# Altium PCB KC_BaseBoard.PcbDoc
Units mil, origin at the board's own origin, x right, y up, seen from the top; angles counter-clockwise.
Board outline 9490 x 7010 mil, 2 copper layers (Top Layer, Bottom Layer); 73 components, 43 nets, 167 pads, 0 vias.
Unrouted connection lines stored in the file: 122.
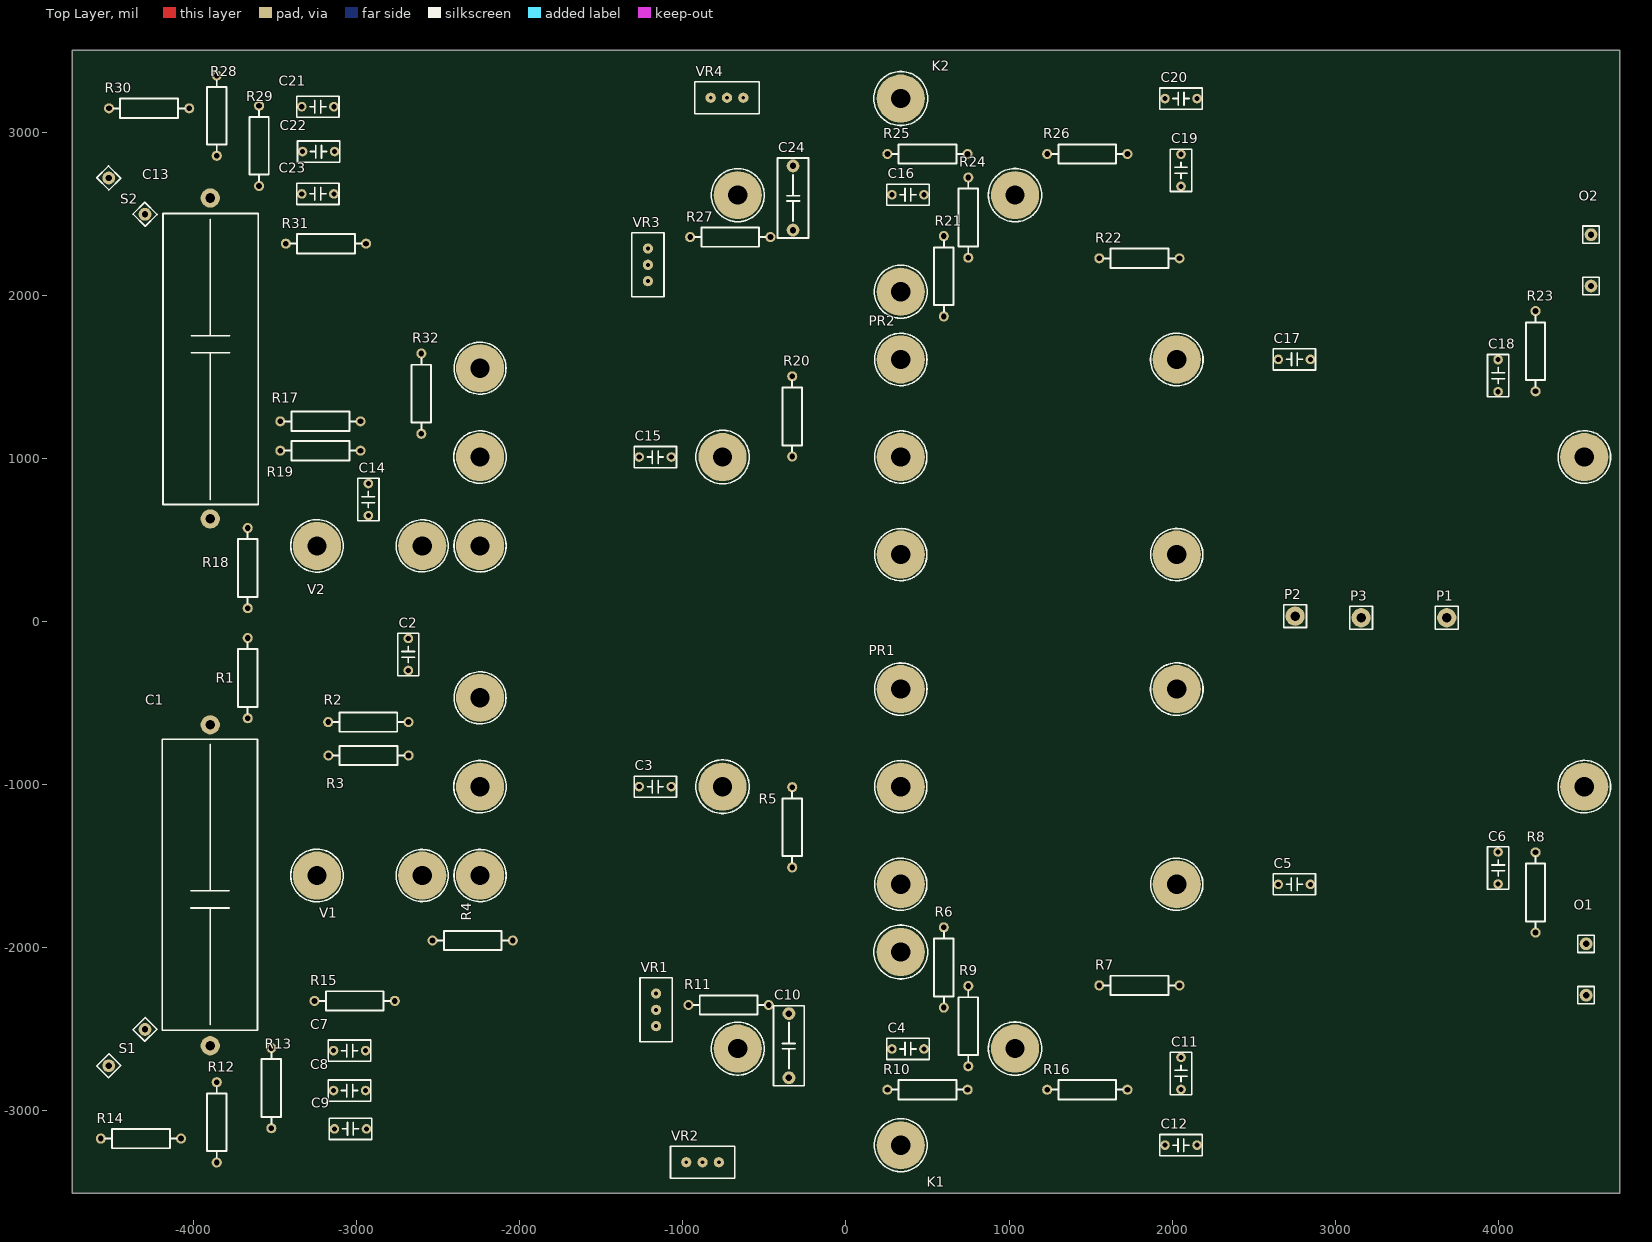
[diagram p0: Top Layer view]
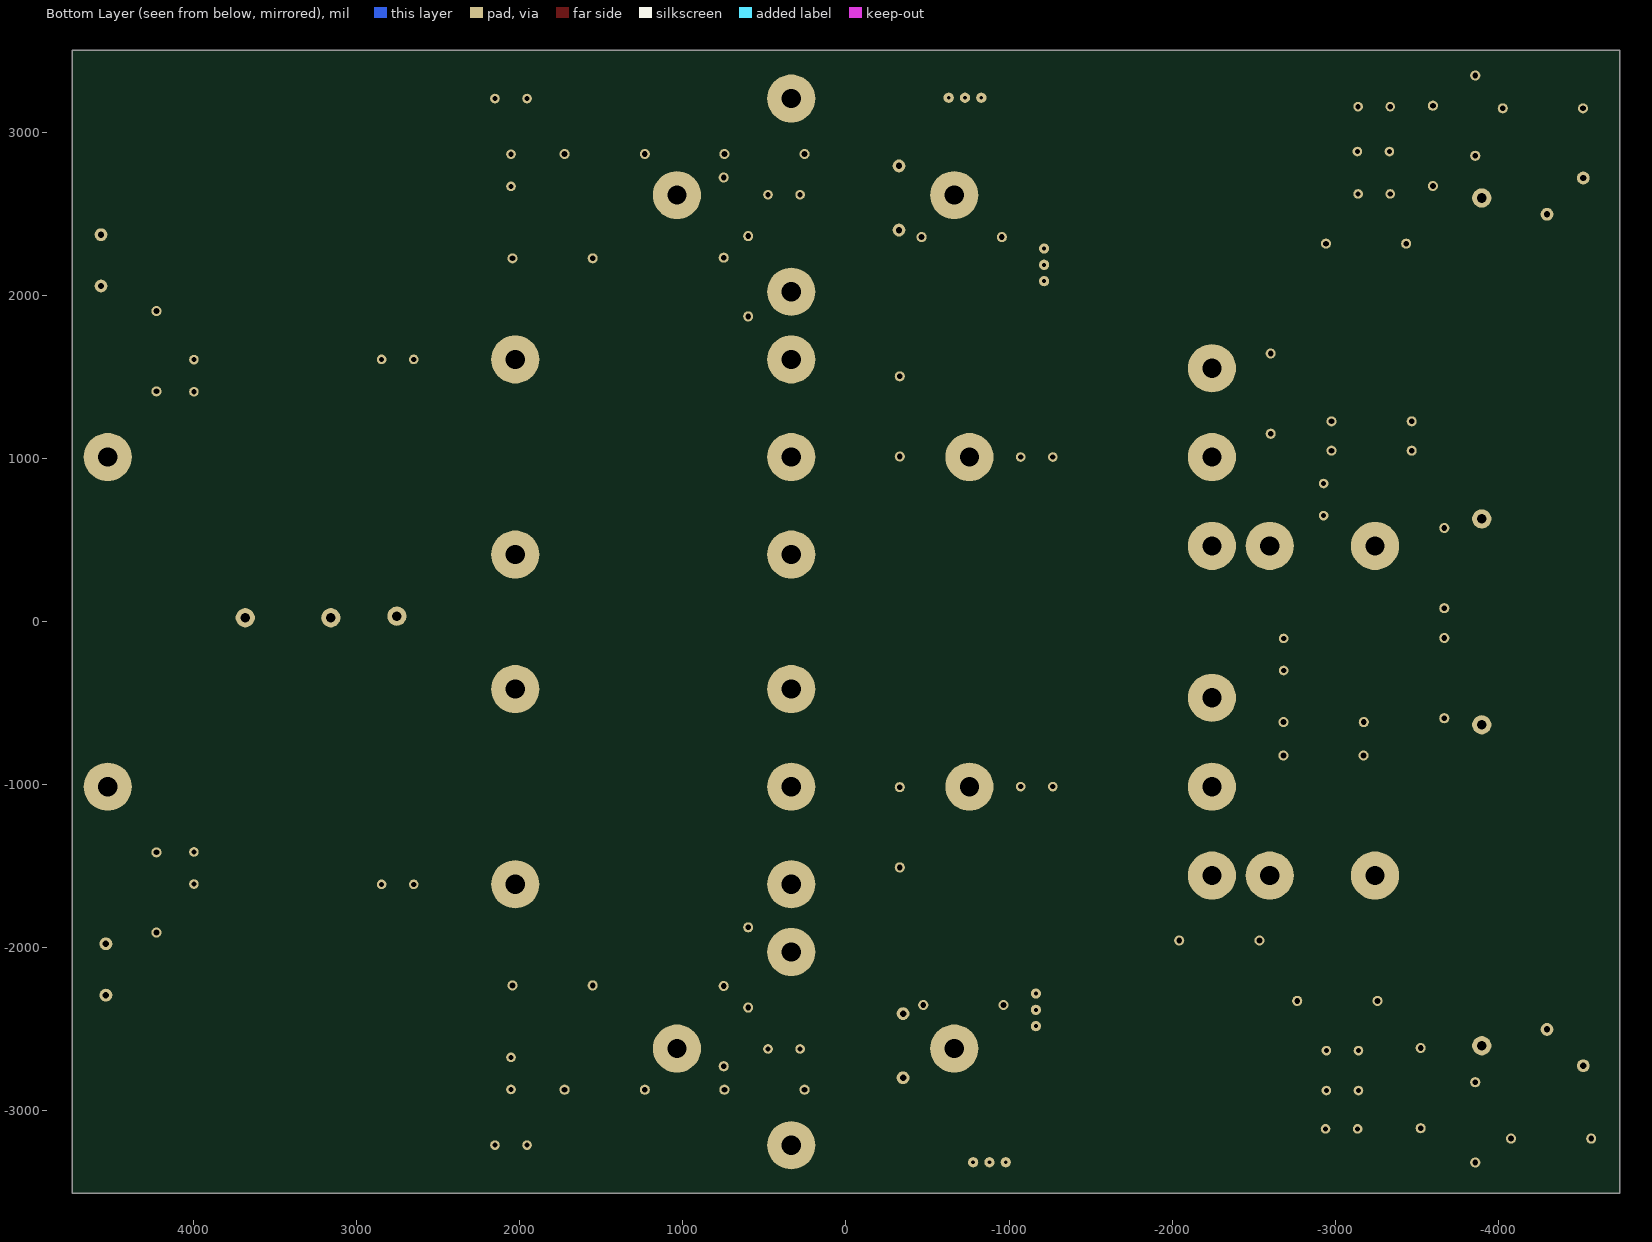
[diagram p1: Bottom Layer view, seen from below]

## Layer stack, top to bottom
Top Solder: solder mask 0.4, Solder Resist, Dk 3.5
Top Layer: signal copper 1.4
Dielectric 1: dielectric 12.6, FR-4, Dk 4.8
Bottom Layer: signal copper 1.4
Bottom Solder: solder mask 0.4, Solder Resist, Dk 3.5

## Board outline
-4745,-3505 -4745,3505 4745,3505 4745,-3505

## Design rules (kind name [scope] priority, off if disabled: settings)
Clearance [All] p1: gap=10 ignorepadtopadclearanceinfootprint=FALSE except(0: Arc-Hole Track-Hole SMDPad-Hole THPad-Hole Via-Hole Fill-Hole Poly-Hole Region-Hole Text-Hole)
PolygonConnect [All] p1: connectstyle=Relief reliefconductorwidth=10 reliefentries=4 polygonreliefangle="90 Angle" airgapwidth=10
RoomDefinition KC_BaseBoardSch [InComponentClass('KC_BaseBoardSch')] p1: confinementstyle=ConfineIn formatcopy=TRUE lockcomponents=FALSE outline 6180,-3443.15 22665,-3443.15 22665,2856.85 6180,2856.85
RoutingVias [All] p1: holewidth=28 width=50 viastyle="Through Hole" minholewidth=28 minwidth=50 maxholewidth=28 maxwidth=50
SolderMaskExpansion [All] p1: expansion=4
Width [All] p1: maxlimit=10 minlimit=10 preferedwidth=10
30 further rules are at their usual default settings.

## Components (designator, comment, footprint, x,y, rotation, side; value= is the part's Value field where it differs from the comment)
C1 "0.1uF/275V" "CBB 50*30*30" -3900,-2600 r90 top
C2 "0.1uF/275V" "CBB 6.3*6.3*5" -2685,-200 r270 top
C3 "0.1uF/275V" "CBB 6.3*6.3*5" -1170,-1011 r0 top
C4 "0.1uF/275V" "CBB 6.3*6.3*5" 380,-2620 r0 top
C5 "0.1uF/275V" "CBB 6.3*6.3*5" 2750,-1610 r0 top
C6 "0.1uF/275V" "CBB 6.3*6.3*5" 4000,-1510 r270 top
C7 "0.1uF/275V" "CBB 6.3*6.3*5" -3045,-2630 r180 top
C8 "0.1uF/275V" "CBB 6.3*6.3*5" -3045,-2875 r180 top
C9 "0.1uF/275V" "CBB 6.3*6.3*5" -3040,-3110 r180 top
C10 "0.1uF/275V" "CBB 10*12*8" -350,-2600 r90 top
C11 "0.1uF/275V" "CBB 6.3*6.3*5" 2055,-2770 r270 top
C12 "0.1uF/275V" "CBB 6.3*6.3*5" 2055,-3210 r0 top
C13 "0.1uF/275V" "CBB 50*30*30" -3900,2600 r270 top
C14 "0.1uF/275V" "CBB 6.3*6.3*5" -2930,750 r90 top
C15 "0.1uF/275V" "CBB 6.3*6.3*5" -1170,1011 r0 top
C16 "0.1uF/275V" "CBB 6.3*6.3*5" 380,2620 r0 top
C17 "0.1uF/275V" "CBB 6.3*6.3*5" 2750,1610 r180 top
C18 "0.1uF/275V" "CBB 6.3*6.3*5" 4000,1510 r90 top
C19 "0.1uF/275V" "CBB 6.3*6.3*5" 2055,2770 r270 top
C20 "0.1uF/275V" "CBB 6.3*6.3*5" 2055,3210 r180 top
C21 "0.1uF/275V" "CBB 6.3*6.3*5" -3240,3160 r0 top
C22 "0.1uF/275V" "CBB 6.3*6.3*5" -3235,2885 r0 top
C23 "0.1uF/275V" "CBB 6.3*6.3*5" -3240,2625 r0 top
C24 "0.1uF/275V" "CBB 10*12*8" -325,2600 r90 top
K1 "KCBuff" KCBUFF -663.9,-2617.7 r0 top
K2 "KCBuff" KCBUFF -663.9,2617.7 r0 top
O1 "Signal_Out" SIGNAL_TERMINAL 4540,-2289.96 r90 top
O2 "Signal_Out" SIGNAL_TERMINAL 4570,2060 r90 top
P1 "Power V+" SinglePin 3685,25 r0 top
P2 "Power V-" SinglePin 2755,35 r0 top
P3 "Power GND" SinglePin 3160,25 r0 top
PR1 "MainBoardPowerRegulator" KC_MBPOWERREG 336,-1011 r0 top
PR2 "MainBoardPowerRegulator" KC_MBPOWERREG 336,1011 r0 top
R1 "270K" "RS 1/2W" -3670,-345 r270 top
R2 "402R" "RS 1/2W" -2930,-615 r0 top
R3 "10R" "RS 1/2W" -2928.94,-820 r0 top
R4 "10R" "RS 1/2W" -2290,-1955 r180 top
R5 "45.3R" "RS 1/2W" -330,-1260 r90 top
R6 "15K" "RS 1/2W" 600,-2120 r270 top
R7 "200R" "RS 1/2W" 1800,-2230 r0 top
R8 "100K" "RS 1/2W" 4230,-1660 r270 top
R9 "24.9K" "RS 1/2W" 750,-2480 r270 top
R10 "24.9K" "RS 1/2W" 500,-2870 r180 top
R11 "100K" "RS 1/2W" -720,-2350 r180 top
R12 "1K" "RS 1/2W" -3860,-3070 r270 top
R13 "200R" "RS 1/2W" -3525,-2860 r90 top
R14 "21R" "RS 1/2W" -4325,-3170 r180 top
R15 "75R" "RS 1/2W" -3013.94,-2325 r180 top
R16 "604R" "RS 1/2W" 1480,-2870 r180 top
R17 "402R" "RS 1/2W" -3223.94,1230 r0 top
R18 "270K" "RS 1/2W" -3670,330 r90 top
R19 "10R" "RS 1/2W" -3223.94,1050 r180 top
R20 "45.3R" "RS 1/2W" -330,1260 r90 top
R21 "15K" "RS 1/2W" 600,2120 r270 top
R22 "200R" "RS 1/2W" 1800,2230 r180 top
R23 "100K" "RS 1/2W" 4230,1660 r90 top
R24 "24.9K" "RS 1/2W" 750,2480 r270 top
R25 "24.9K" "RS 1/2W" 500,2870 r0 top
R26 "604R" "RS 1/2W" 1480,2870 r180 top
R27 "100K" "RS 1/2W" -710,2360 r180 top
R28 "1K" "RS 1/2W" -3860,3105 r90 top
R29 "200R" "RS 1/2W" -3600,2920 r90 top
R30 "21R" "RS 1/2W" -4275,3150 r0 top
R31 "75R" "RS 1/2W" -3190,2320 r180 top
R32 "10R" "RS 1/2W" -2605,1400 r270 top
S1 "Signal_In" SIGNAL_TERMINAL -4300,-2500 r225 top
S2 "Signal_In" SIGNAL_TERMINAL -4300,2500 r135 top
V1 "KCInputVas" KCIN_VAS -3245,-1556 r0 top
V2 "KCInputVas" KCIN_VAS -3245,466 r0 top
VR1 "100K" "RS 1/2W-VR" -1165,-2380 r270 top
VR2 "5K" "RS 1/2W-VR" -880,-3315 r0 top
VR3 "100K" "RS 1/2W-VR" -1215,2190 r270 top
VR4 "5K" "RS 1/2W-VR" -730,3215 r180 top

## Footprints (in the part's own frame and the unit in brackets; to place one, negate y for a bottom-side part, rotate by r counter-clockwise, add the part's x,y. Pads: shape width x height; smd on the part's side, far side on the other; paste and mask are expansions set on the pad)
"CBB 6.3*6.3*5" [mm] "脚距5mm高6.3mm厚3mm"
  round 1.5 hole 0.8: 1(-2.5,0) 2(2.5,0)
  silkscreen extent -3.3,-1.65 3.3,1.65, body extent -3.15,-1.5 3.15,1.5, height 6.8
"CBB 10*12*8" [mm] "脚距10mm高12mm厚8mm"
  round 2 hole 1: 1(-5,0) 2(5,0)
  silkscreen extent -6.22,-2.41 6.22,2.41, body extent -6,-2.25 6,2.25, height 8.53
"CBB 50*30*30" [mm] "大型耦合电容 脚距50mm 宽30mm"
  round 3 hole 1.5: 1(0,0) 2(50,0)
  silkscreen extent 2.41,-7.37 47.75,7.49, body extent 2.41,-7.49 47.75,7.62, height 30.3
KC_MBPOWERREG [mm]
  round 7.5 hole 3: 1(0,15.2) 2(0,-15.2) 3(43,15.2) 4(43,-15.2) 5(0,0) 6(106.5,0)
  silkscreen extent -4.07,-19.27 110.59,19.29
KCBUFF [mm]
  round 7.5 hole 3: 1(0,0) 2(43.199,0) 3(25.397,15.05) 4(25.397,-15.05)
  silkscreen extent -4.13,-19.18 47.35,19.25
KCIN_VAS [mm]
  round 7.5 hole 3: 1(0,0) 2(16.396,0) 3(25.4,27.686) 4(25.4,0) 5(25.4,13.843) 6(63.182,13.843)
  silkscreen extent -4.09,-4.09 67.36,31.73
"RS 1/2W" [mil] "直插色环电阻，脚距12.5mm，直径3mm"
  round 62 hole 35.43: 1(-246.06,0) 2(246.06,0)
  silkscreen extent -217,-59 217,59, body extent -256,-59 256,59, height 122
"RS 1/2W-VR" [mm] "直插3脚顶调可调电阻，脚距2.54mm，长10mm*宽5mm*高10mm"
  round 1.6 hole 0.6: 1(-2.54,0) 2(2.54,0) 3(0,0)
  silkscreen extent -5,-2.5 5,2.5
SIGNAL_TERMINAL [mm]
  round 2 hole 1: 1(0,0) 2(8,0)
  silkscreen extent -1.35,-1.3 9.35,1.3
SinglePin [mm] "Single Pin For Power Wire or GND"
  round 3 hole 1.5: 1(0,0)
  silkscreen extent -1.78,-1.78 1.78,1.78

## Part data
C1 C2 C3 C4 C5 C6 C7 C8 C9 C10 C11 C12 C13 C14 C15 C16 C17 C18 C19 C20 C21 C22 C23 C24: library part C-CBB, "CBB电容", BOM名称=CBB电容, 学习资源=www.ooocke.com, 版权归属=源创客
K1 K2: "King Cello Buffer Stage"
O1 O2: "Signal Out"
P1 P2: library part PowerPin, "Power Pin"
P3: library part PowerPin
PR1 PR2: "King Cello Main Board Power Regulator"
R1 R2 R3 R4 R5 R6 R7 R8 R9 R10 R11 R12 R13 R14 R15 R16 R17 R18 R19 R20 R21 R22 R23 R24 R25 R26 R27 R28 R29 R30 R31 R32: library part R-CRR, "直插色环电阻", BOM名称=色环电阻, 学习资源=www.ooocke.com, 版权归属=源创客
S1 S2: "Signal In"
V1 V2: "King Cello Input Stage and VAS"
VR1 VR2 VR3 VR4: library part VR-W, "直插可调电阻-顶调"

## Nets (pads, with @x,y where several pads share a name; then routed paths per layer and width w, separated by ;. In a path a pad name is that pad's centre, name@x,y a point inside that pad or via, vN(x,y) a via of type N, cw(c..) or ccw(c..) an arc to the next point about the centre after c; other vN are vias at no path point)
GND: C2.1 C6.1 C11.1 C12.1 C14.1 C18.2 C19.2 C20.2 O1.2 O2.2 P3.1 PR1.5 PR2.5 R1.1 R6.1 R8.1 R14.1 R15.1 R18.1 R21.2 R23.2 R30.1 R31.1 S1.2 S2.2 V1.5 V2.5
NetC1_1: C1.1 S1.1
NetC1_2: C1.2 R1.2 R2.1
NetC2_2: C2.2 R2.2 R3.2
NetC3_1: C3.1 C7.2 C8.2 C9.2 R4.1 R10.2
NetC3_2: C3.2 R5.2 V1.6
NetC4_1: C4.1 K1.1 R5.1
NetC4_2: C4.2 R6.2
NetC5_1: C5.1 C5.2 C6.2 O1.1 R7.2 R8.2
NetC7_1: C7.1 C8.1 C9.1 R13.2 R14.2 R15.2
NetC10_1: C10.1 VR2.1 VR2.3
NetC10_2: C10.2 K1.2 R7.1 R9.1 R11.1
NetC11_2: C11.2 C12.2 R16.1
NetC13_1: C13.1 S2.1
NetC13_2: C13.2 R17.1 R18.2
NetC14_2: C14.2 R17.2 R19.1
NetC15_1: C15.1 C21.1 C22.1 C23.1 R25.1 R32.1
NetC15_2: C15.2 R20.1 V2.6
NetC16_1: C16.1 K2.1 R20.2
NetC16_2: C16.2 R21.1
NetC17_1: C17.1 C17.2 C18.1 O2.1 R22.1 R23.1
NetC19_1: C19.1 C20.1 R26.1
NetC21_2: C21.2 C22.2 C23.2 R29.2 R30.2 R31.2
NetC24_1: C24.1 K2.2 R22.2 R24.2 R27.1
NetC24_2: C24.2 VR4.1 VR4.3
NetK1_3: K1.3 PR1.1 V1.3
NetK1_4: K1.4 PR1.2 V1.4
NetK2_3: K2.3 PR2.1 V2.3
NetK2_4: K2.4 PR2.2 V2.4
NetP1_1: P1.1 PR1.3 PR2.3
NetP2_1: P2.1 PR1.4 PR2.4
NetR3_1: R3.1 V1.1
NetR4_2: R4.2 V1.2
NetR9_2: R9.2 R10.1 R16.2
NetR11_2: R11.2 VR1.1 VR1.3
NetR12_1: R12.1 R13.1
NetR12_2: R12.2 VR1.2 VR2.2
NetR19_2: R19.2 V2.1
NetR24_1: R24.1 R25.2 R26.2
NetR27_2: R27.2 VR3.1 VR3.3
NetR28_1: R28.1 R29.1
NetR28_2: R28.2 VR3.2 VR4.2
NetR32_2: R32.2 V2.2
pads on no net: PR1.6 PR2.6

## Silkscreen, mask and mechanical layers (free items; w line width, h text height)
Drill Drawing:
  the board outline again, w10